# Altium PCB PCB1.PcbDoc
Units mil, origin at the board's own origin, x right, y up, seen from the top; angles counter-clockwise.
Board outline 6000 x 4000 mil, 2 copper layers (Top Layer, Bottom Layer); 2 components, 0 nets, 30 pads, 0 vias.
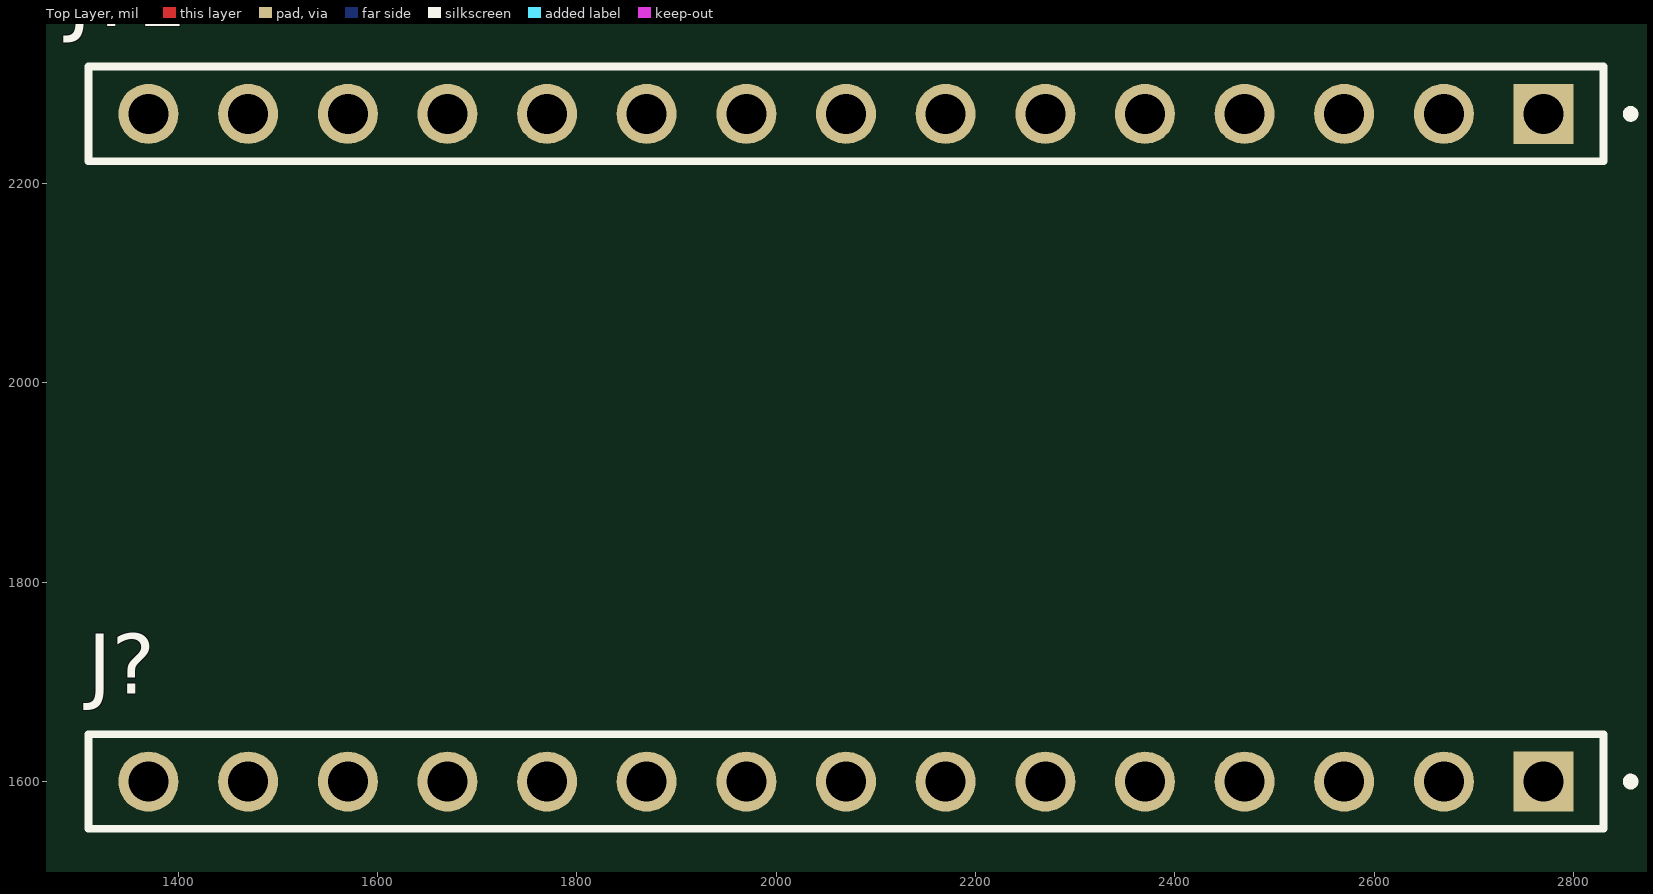
[diagram p0: Top Layer view]
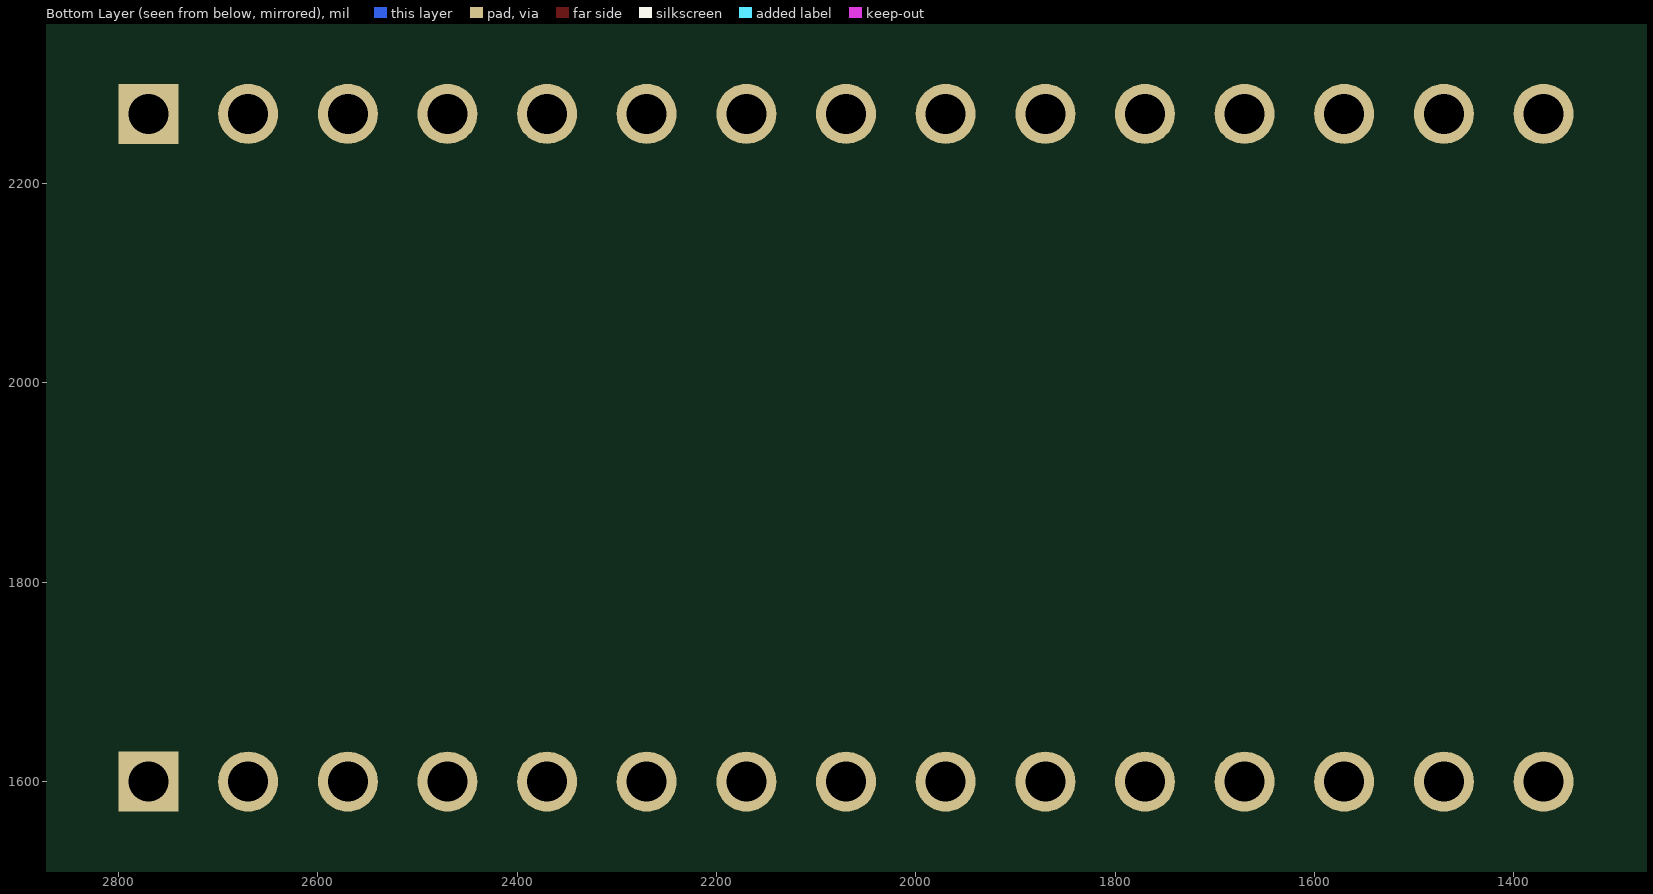
[diagram p1: Bottom Layer view, seen from below]

## Layer stack, top to bottom
Top Solder: solder mask 0.4, Solder Resist, Dk 3.5
Top Layer: signal copper 1.4
Dielectric 1: dielectric 12.6, FR-4, Dk 4.8
Bottom Layer: signal copper 1.4
Bottom Solder: solder mask 0.4, Solder Resist, Dk 3.5

## Board outline
1000,1000 7000,1000 7000,5000 1000,5000

## Design rules (kind name [scope] priority, off if disabled: settings)
Clearance [All] p1: gap=10 ignorepadtopadclearanceinfootprint=FALSE except(0: Arc-Hole Track-Hole SMDPad-Hole THPad-Hole Via-Hole Fill-Hole Poly-Hole Region-Hole Text-Hole)
PolygonConnect [All] p1: connectstyle=Relief reliefconductorwidth=10 reliefentries=4 polygonreliefangle="90 Angle" airgapwidth=10
RoutingVias [All] p1: holewidth=28 width=50 viastyle="Through Hole" minholewidth=28 minwidth=50 maxholewidth=28 maxwidth=50
SolderMaskExpansion [All] p1: expansion=4 istentingtop=FALSE
Width [All] p1: maxlimit=10 minlimit=10 preferedwidth=10
30 further rules are at their usual default settings.

## Classes and differential pairs
component class Sheet1: J?

## Components (designator, comment, footprint, x,y, rotation, side; value= is the part's Value field where it differs from the comment)
J? "SSQ-115-X-X-S" SAMTEC_SSQ-115-X-X-S 2070,1600 r180 top
J?1 "SSQ-115-X-X-S" SAMTEC_SSQ-115-X-X-S 2070,2270 r180 top (schematic designator J?)

## Footprints (in the part's own frame and the unit in brackets; to place one, negate y for a bottom-side part, rotate by r counter-clockwise, add the part's x,y. Pads: shape width x height; smd on the part's side, far side on the other; paste and mask are expansions set on the pad)
SAMTEC_SSQ-115-X-X-S [mm]
  rect 1.53x1.53 hole 1.02: 01(-17.78,0)
  round 1.53 hole 1.02: 02(-15.24,0) 03(-12.7,0) 04(-10.16,0) 05(-7.62,0) 06(-5.08,0) 07(-2.54,0) 08(0,0) 09(2.54,0) 10(5.08,0) 11(7.62,0) 12(10.16,0) 13(12.7,0) 14(15.24,0) 15(17.78,0)
  silkscreen extent -20.1,-1.2 19.31,1.2

## Part data
J? J?1: Package=None, Availability=Unavailable, MF="{'manufacturer': u'Samtec'}", MP=SSQ-115-X-X-S, Price=None

## Nets (pads, with @x,y where several pads share a name; then routed paths per layer and width w, separated by ;. In a path a pad name is that pad's centre, name@x,y a point inside that pad or via, vN(x,y) a via of type N, cw(c..) or ccw(c..) an arc to the next point about the centre after c; other vN are vias at no path point)
pads on no net: J?1.01 J?1.02 J?1.03 J?1.04 J?1.05 J?1.06 J?1.07 J?1.08 J?1.09 J?1.10 J?1.11 J?1.12 J?1.13 J?1.14 J?1.15 J?.01 J?.02 J?.03 J?.04 J?.05 J?.06 J?.07 J?.08 J?.09 J?.10 J?.11 J?.12 J?.13 J?.14 J?.15